# Altium PCB DE-250624.PcbDoc
Units mm, origin at the board's own origin, x right, y up, seen from the top; angles counter-clockwise.
Board outline 75 x 75 mm, 2 copper layers (Top Layer, Bottom Layer); 75 components, 46 nets, 198 pads, 28 vias.
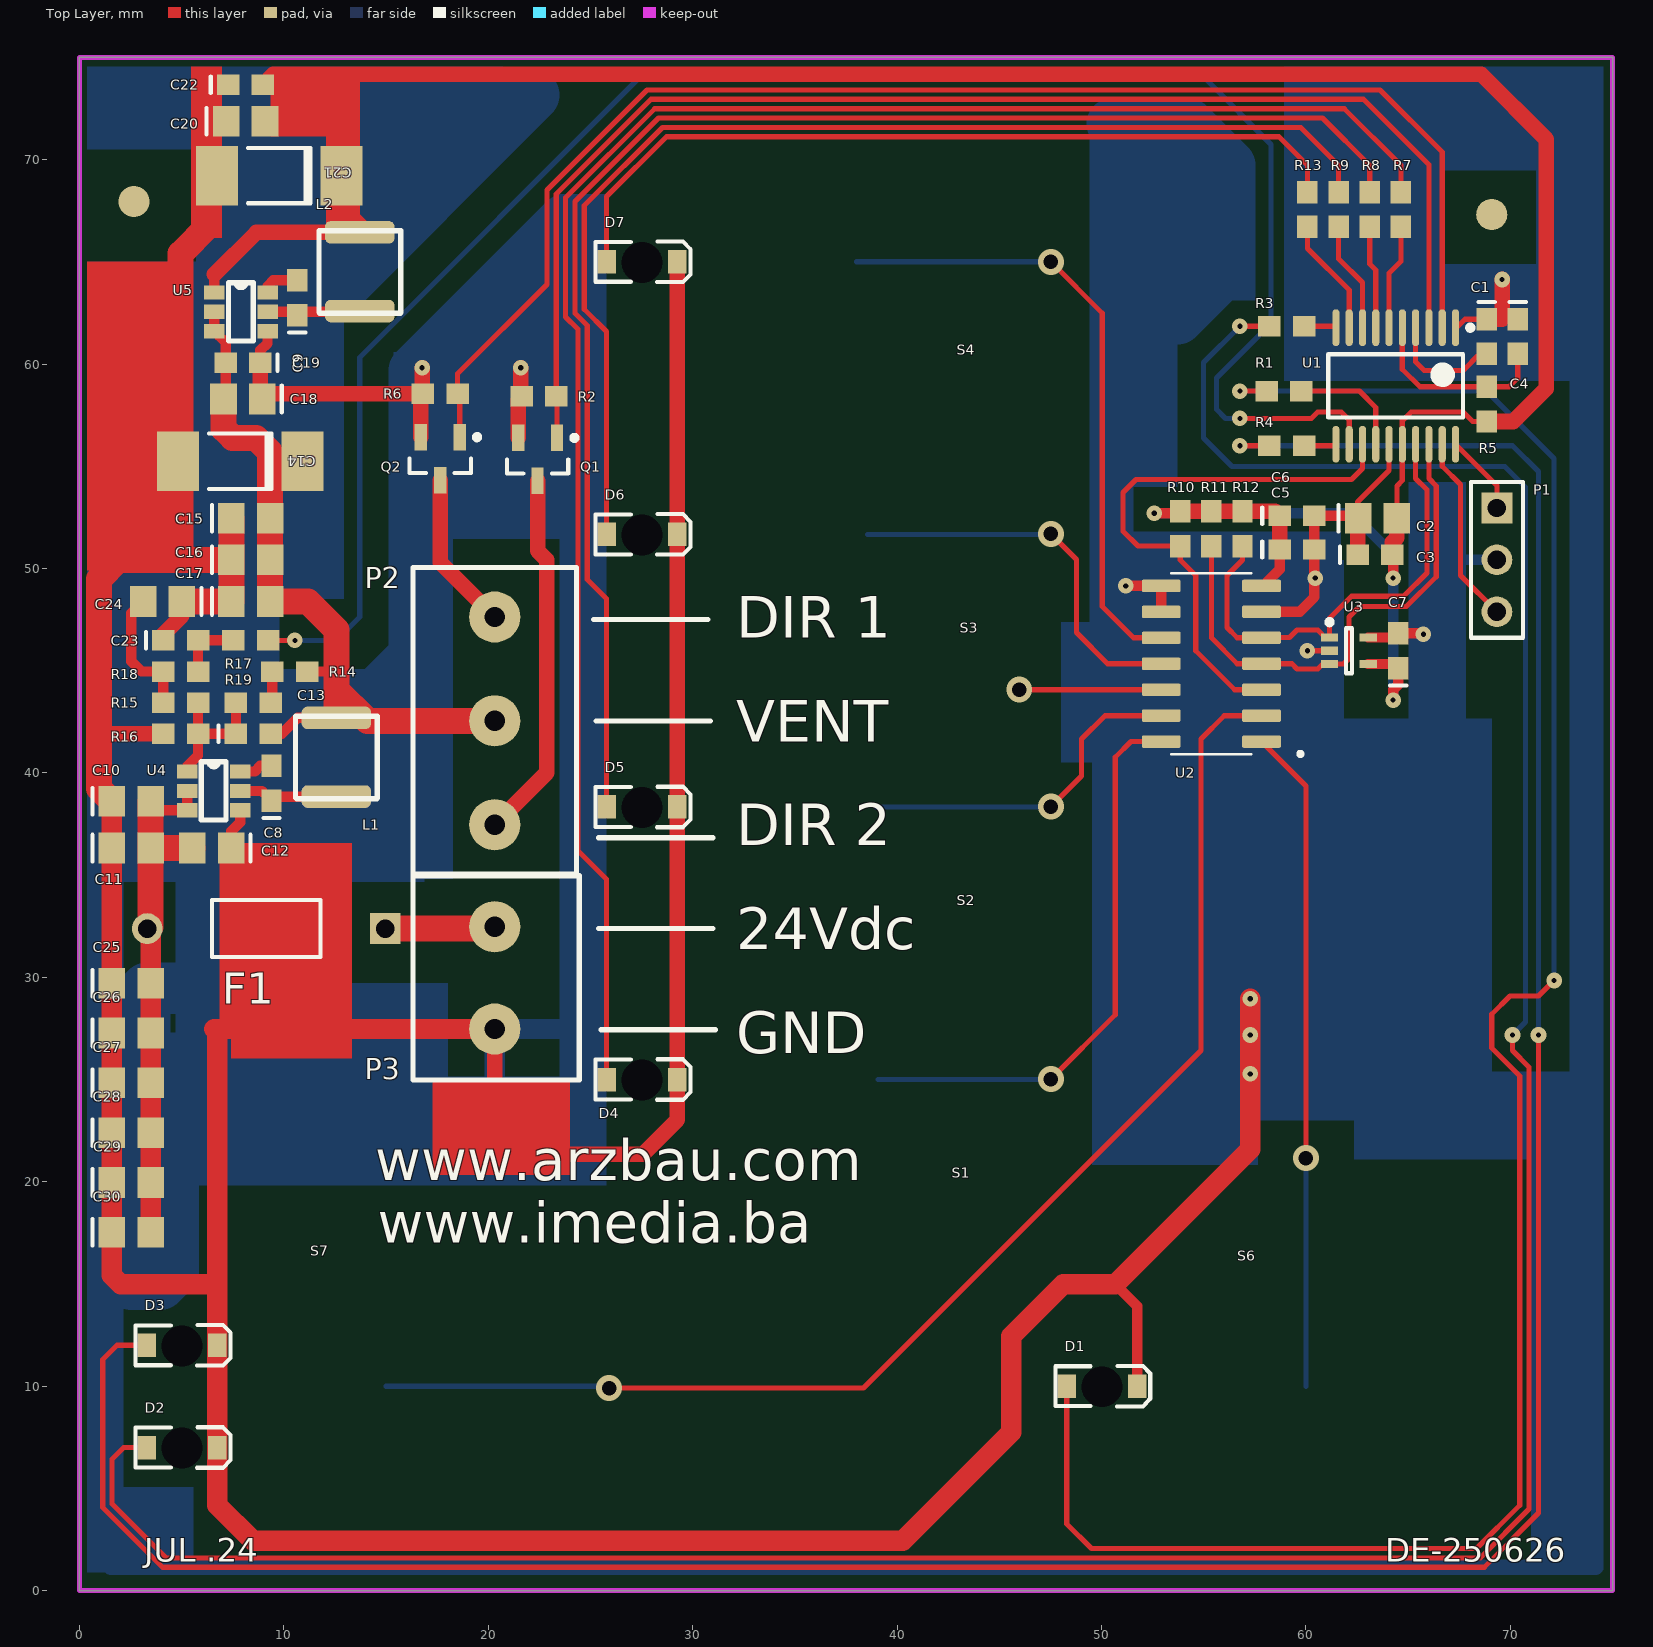
[diagram p0: Top Layer view]
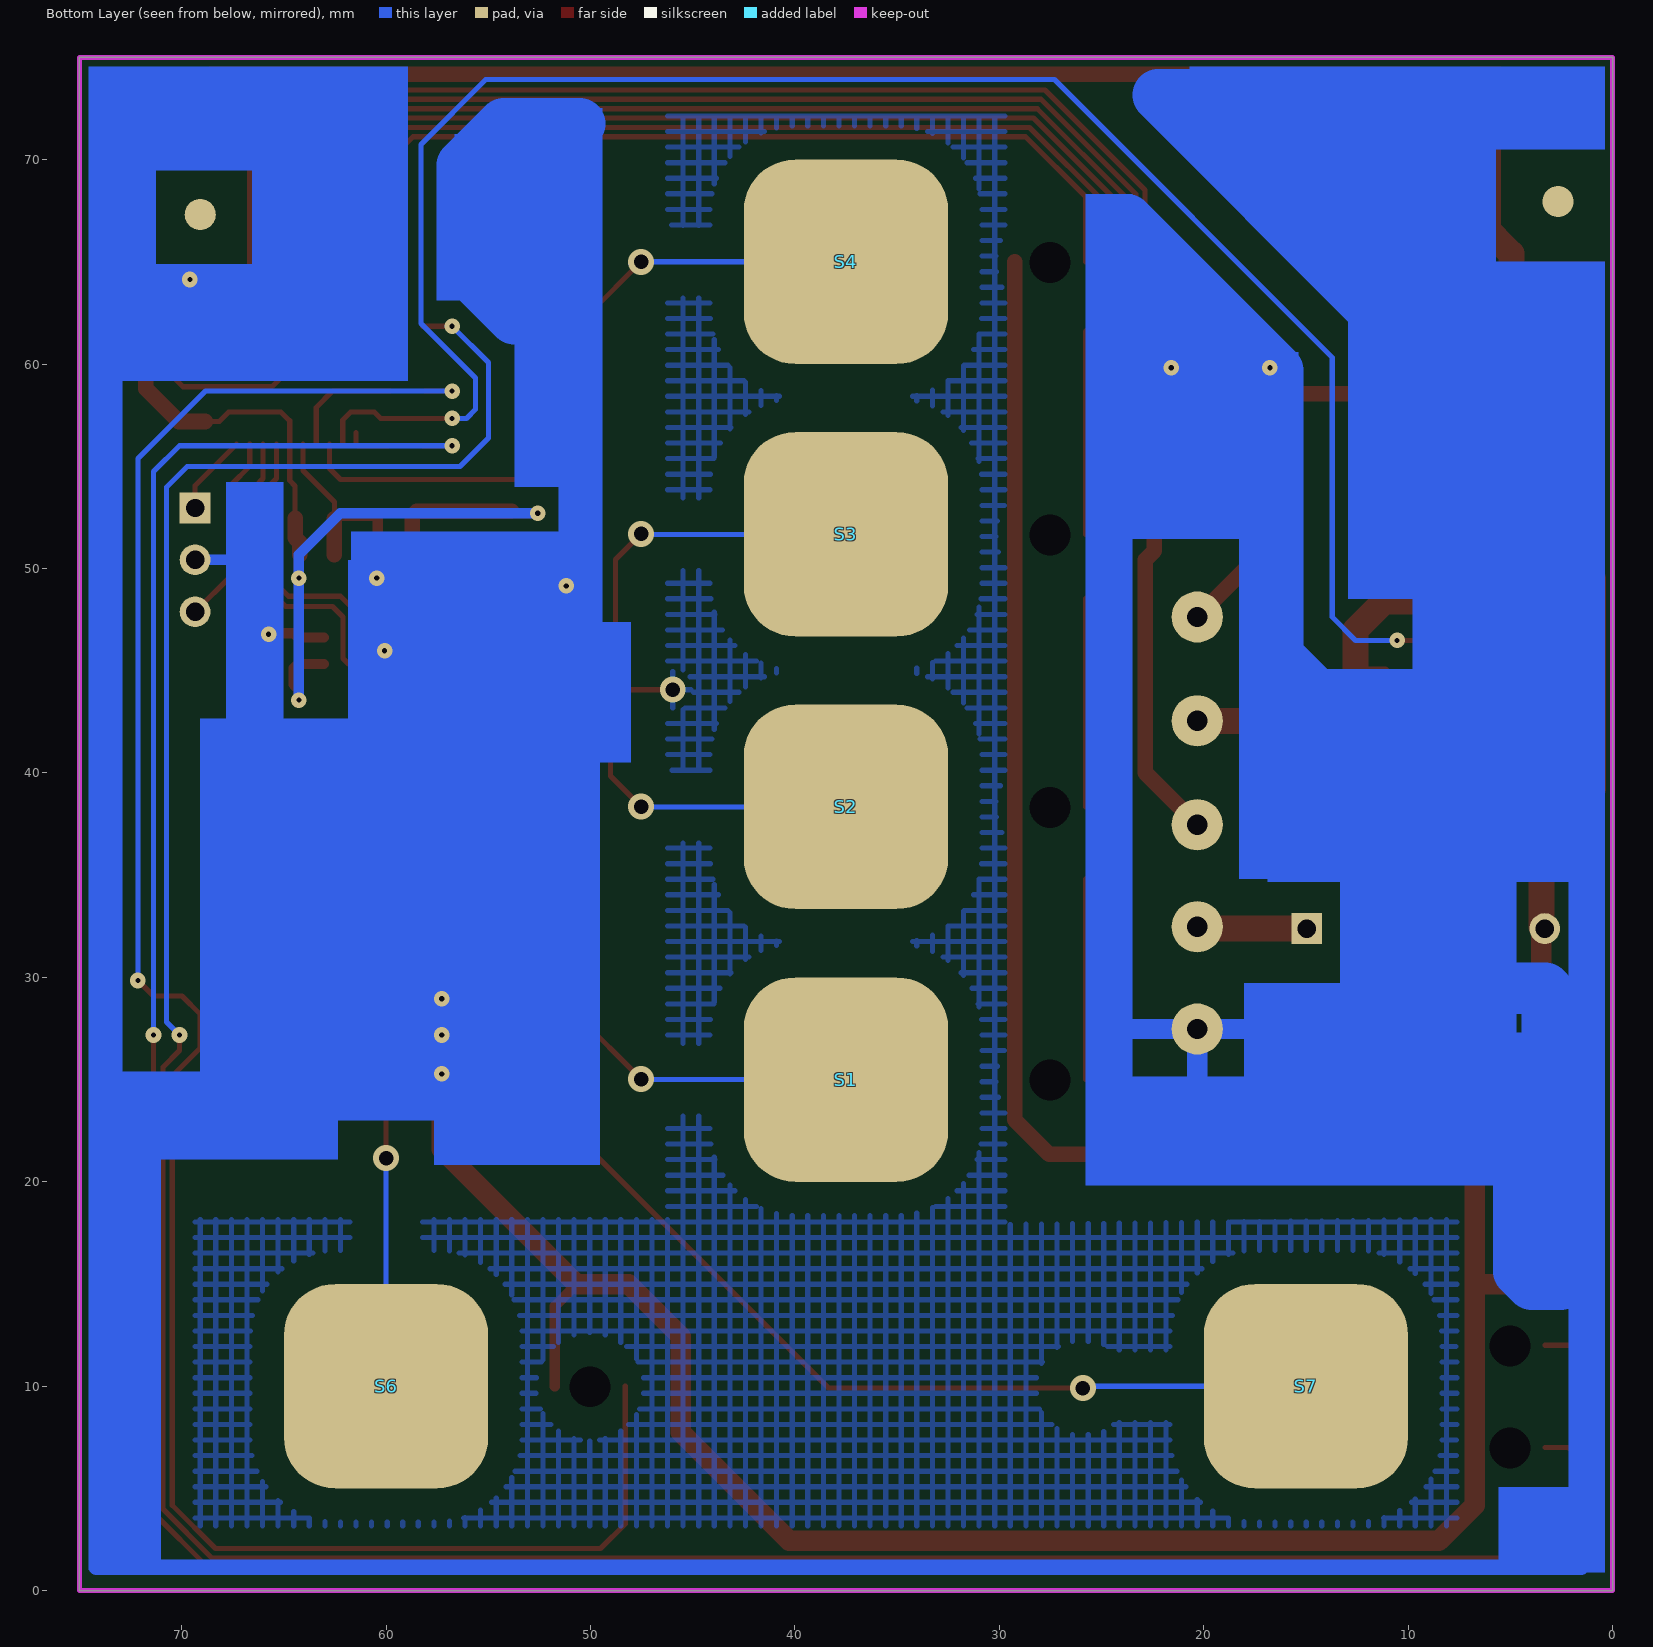
[diagram p1: Bottom Layer view, seen from below]

## Layer stack, top to bottom
Top Solder: solder mask 0.0102, Solder Resist, Dk 3.5
Top Layer: signal copper 0.0356
Dielectric 1: dielectric 0.32, FR-4, Dk 4.8
Bottom Layer: signal copper 0.0356
Bottom Solder: solder mask 0.0102, Solder Resist, Dk 3.5

## Board outline
0,0 0,75 75,75 75,0

## Design rules (kind name [scope] priority, off if disabled: settings)
Clearance [All] p1: gap=0.203 ignorepadtopadclearanceinfootprint=FALSE except(0: Arc-Hole Track-Hole SMDPad-Hole THPad-Hole Via-Hole Fill-Hole Poly-Hole Region-Hole Text-Hole; 1.524: Arc-Poly Track-Poly SMDPad-Poly THPad-Poly Via-Poly Fill-Poly Poly-Poly)
MinimumSolderMaskSliver [All] p1 off: minsoldermaskwidth=0.254
PlaneClearance [All] p1: clearance=0.254
PolygonConnect [All] p1: connectstyle=Relief reliefconductorwidth=0.254 reliefentries=4 polygonreliefangle="90 Angle" airgapwidth=0.254
RoutingVias [All] p1: holewidth=0.711 width=1.27 viastyle="Through Hole" minholewidth=0.254 minwidth=0.762 maxholewidth=1.27 maxwidth=2.54
SilkToSilkClearance [All] p1 off: silktosilkclearance=0.254
SilkToSolderMaskClearance [IsPad] p1 off: minsilkscreentomaskgap=0.254 clearancetoexposedcopper=TRUE
SolderMaskExpansion [All] p1: expansion=0.102
Width [All] p1: maxlimit=2.54 minlimit=0.254 preferedwidth=0.508
26 further rules are at their usual default settings.

## Components (designator, comment, footprint, x,y, rotation, side; value= is the part's Value field where it differs from the comment)
C1 "C0603" 0603 68.834,61.341 r270 top value=100nF
C2 "C0805" 0805 63.5,52.451 r0 top value=10uF
C3 "C0603" 0603 63.373,50.673 r0 top value=100nF
C4 "C0603" 0603 70.358,61.341 r270 top value=100nF
C5 "C0603" 0603 59.563,50.927 r0 top value=1uF
C6 "C0603" 0603 59.563,52.578 r0 top value=100nF
C7 "C0603" 0603 64.516,45.974 r90 top value=100nF
C8 "100nF" 0603 9.398,39.497 r90 top
C9 "100nF" 0603 10.668,63.246 r90 top
C10 "C0805" 0805 2.54,38.608 r0 top value=22uF
C11 "C0805" 0805 2.54,36.322 r0 top value=22uF
C12 "C0805" 0805 6.477,36.322 r180 top value=22uF
C13 "C0603" 0603 8.509,41.91 r0 top value=100pF
C14 "22uF" "E (8.2 x 4.3 mm)" 7.874,55.245 r180 top
C15 "C0805" 0805 8.382,52.451 r0 top value=22uF
C16 "C0805" 0805 8.382,50.419 r0 top value=22uF
C17 "C0805" 0805 8.382,48.387 r0 top value=22uF
C18 "C0805" 0805 8.001,58.293 r180 top value=22uF
C19 "C0603" 0603 8.001,60.071 r180 top value=100nF
C20 "C0805" 0805 8.128,71.882 r0 top value=22uF
C21 "22uF" "E (8.2 x 4.3 mm)" 9.779,69.215 r180 top
C22 "C0603" 0603 8.128,73.66 r0 top value=100nF
C23 "C0603" 0603 4.953,46.482 r0 top value=100nF
C24 "C0805" 0805 4.064,48.387 r180 top value=10uF
C25 "C0805" 0805 2.54,29.718 r0 top value=22uF
C26 "C0805" 0805 2.54,27.28 r0 top value=22uF
C27 "C0805" 0805 2.54,24.841 r0 top value=22uF
C28 "C0805" 0805 2.54,22.403 r0 top value=22uF
C29 "C0805" 0805 2.54,19.964 r0 top value=22uF
C30 "C0805" 0805 2.54,17.526 r0 top value=22uF
D1 "LED_ON_OFF" "LED sa rupom" 50,10 r0 top locked
D2 "LED_HREC" "LED sa rupom" 5,7 r0 top locked
D3 "LED_VENT" "LED sa rupom" 5,12 r0 top locked
D4 "LED_SPEED_4" "LED sa rupom" 27.5,25 r0 top locked
D5 "LED_SPEED_3" "LED sa rupom" 27.5,38.333 r0 top locked
D6 "LED_SPEED_2" "LED sa rupom" 27.5,51.667 r0 top locked
D7 "LED_SPEED_1" "LED sa rupom" 27.5,65 r0 top locked
F1 "0ZRG0120FF1E" PIN-W2/E2.8 9.144,32.385 r180 top
L1 "ASPI-4030S-100M-T" ASPI-4030S 12.573,40.767 r180 top
L2 "ASPI-4030S-100M-T" ASPI-4030S 13.716,64.516 r180 top
P1 "ICSP" HDR1X3 69.342,52.959 r270 top
P2 "VENT" "TERMINAL BLOK 3" 20.32,42.545 r0 top
P3 "DC_IN" "TERMINAL BLOK 2" 20.32,29.972 r0 top
Q1 "ZXMN3B14F" SOT23_N 22.413,55.338 r270 top
Q2 "ZXMN3B14F" SOT23_N 17.653,55.372 r270 top
R1 "2K2" ERA-0603 58.928,58.674 r180 top
R2 "10K" ERA-0603 22.479,58.42 r0 top
R3 "2K2" ERA-0603 59.055,61.849 r180 top
R4 "2K2" ERA-0603 59.055,56.007 r180 top
R5 "10R" ERA-0603 68.834,58.039 r90 top
R6 "10K" ERA-0603 17.653,58.547 r0 top
R7 "2K2" ERA-0603 64.643,67.564 r90 top
R8 "2K2" ERA-0603 63.119,67.564 r90 top
R9 "2K2" ERA-0603 61.595,67.564 r90 top
R10 "10K" ERA-0603 53.848,51.943 r90 top
R11 "10K" ERA-0603 55.372,51.943 r90 top
R12 "10K" ERA-0603 56.896,51.943 r90 top
R13 "2K2" ERA-0603 60.071,67.564 r90 top
R14 "22K" ERA-0603 10.287,44.958 r180 top
R15 "120K" ERA-0603 4.953,43.434 r180 top
R16 "22K" ERA-0603 4.953,41.91 r0 top
R17 "1K2" ERA-0603 8.382,46.482 r180 top
R18 "10K" ERA-0603 4.953,44.958 r180 top
R19 "330K" ERA-0603 8.509,43.434 r0 top
S1 "SENS_SPEED_1" SENSOR_PAD#1 38.862,24.765 r0 top
S2 "SENS_SPEED_2" SENSOR_PAD#2 37.719,38.552 r0 top
S3 "SENS_SPEED_3" SENSOR_PAD#3 38.862,51.667 r0 top
S4 "SENS_SPEED_4" SENSOR_PAD#4 38.608,63.754 r0 top
S6 "SENS_ON_OFF" SENSOR_PAD#5 59.563,14.986 r0 top
S7 "SENS_MODE" SENSOR_PAD#6 14.859,14.732 r0 top
U1 "STM32F030F4P6" STM-TSSOP20_N 64.389,58.928 r270 top
U2 "CAP1298" SOIC14 55.372,45.339 r180 top
U3 "24AA01T-I/LT" SC70-LT5_N 62.103,45.974 r0 top
U4 "AP63200" TSOT-26 5.274,40.066 r0 top
U5 "AP63203" TSOT-26 6.604,63.5 r0 top

## Footprints (in the part's own frame and the unit in brackets; to place one, negate y for a bottom-side part, rotate by r counter-clockwise, add the part's x,y. Pads: shape width x height; smd on the part's side, far side on the other; paste and mask are expansions set on the pad)
0603 [mm] "Chip Capacitor; Body 1.6 x 0.8 mm (LxW typ)"
  rect 1.1x1 smd: 1(-0.85,0) 2(0.85,0)
  silkscreen extent -1.7,-0.4 -1.7,0.4
0805 [mm] "Chip Capacitor; Body 2.0 x 1.2 mm (LxW typ)"
  rect 1.3x1.5 smd: 1(-0.95,0) 2(0.95,0)
  silkscreen extent -1.9,-0.65 -1.9,0.65
ASPI-4030S [mm] "SMD Inductor ASPI-4030S"
  rrect50% 3.4x1.1 smd: 1(0,1.925) 2(0,-1.925)
  silkscreen extent -2.01,-2.01 2,2.03, body extent -2.11,-2.13 2.11,2.16, height 3
"E (8.2 x 4.3 mm)" [mm] "Chip Capacitor; Body 8.2 x 4.3 mm"
  rect 2.05x2.9 smd: 1(-3.05,0) 2(3.05,0)
  silkscreen extent -1.52,-1.35 1.54,1.35
ERA-0603 [mm] "Chip Resistor; Body 1.6 x 0.8 mm (LxW typ)"
  rect 1.1x1 smd: 1(-0.85,0) 2(0.85,0)
HDR1X3 [mm] "Connector; Header; 3 Position"
  rect 1.5x1.5 hole 0.9: 1(0,0)
  round 1.5 hole 0.9: 2(2.54,0) 3(5.08,0)
  silkscreen extent -1.27,-1.27 6.35,1.27
"LED sa rupom" [mm] "SM LED; 2 Flat Leads"
  rect 0.9x1.15 smd: 1(-1.702,0) 2(1.753,0)
  round 0 hole 2: ""(0.025,-0.025)
  silkscreen extent -2.26,-0.99 2.38,0.99
PIN-W2/E2.8 [mm] "Thru-Hole; 2 Leads"
  rect 1.5x1.5 hole 0.9: 1(-5.825,0)
  round 1.5 hole 0.9: 2(5.825,0)
  silkscreen extent -2.65,-1.4 2.65,1.4
SC70-LT5_N [mm] "SOT353, 5-Leads, Body 2x1.3mm, Pitch 0.65mm, Lead Span 2.1mm, IPC Medium Density"
  rect 0.85x0.4 smd: 1(-0.95,0.65) 2(-0.95,0) 3(-0.95,-0.65) 4(0.95,-0.65) 5(0.95,0.65)
  silkscreen extent -1.07,-1.1 0.15,1.52, body extent -0.7,-1.1 0.7,1.1, height 1.1
SENSOR_PAD#1 [mm] "pcb trace touch sensor pad"
  rrect50% 10x10 smd far side: 1(-1.362,0.235)
SENSOR_PAD#2 [mm] "pcb trace touch sensor pad"
  rrect50% 10x10 smd far side: 1(-0.219,-0.219)
SENSOR_PAD#3 [mm] "pcb trace touch sensor pad"
  rrect50% 10x10 smd far side: 1(-1.362,0)
SENSOR_PAD#4 [mm] "pcb trace touch sensor pad"
  rrect50% 10x10 smd far side: 1(-1.108,1.246)
SENSOR_PAD#5 [mm] "pcb trace touch sensor pad"
  rrect50% 10x10 smd far side: 1(0.437,-4.986)
SENSOR_PAD#6 [mm] "pcb trace touch sensor pad"
  rrect50% 10x10 smd far side: 1(0.141,-4.732)
SOIC14 [mm]
  rrect25% 1.9x0.6 smd: 1(-2.455,3.81) 2(-2.455,2.54) 3(-2.455,1.27) 4(-2.455,0) 5(-2.455,-1.27) 6(-2.455,-2.54) 7(-2.455,-3.81) 8(2.455,-3.81) 9(2.455,-2.54) 10(2.455,-1.27) 11(2.455,0) 12(2.455,1.27) 13(2.455,2.54) 14(2.455,3.81)
  silkscreen extent -4.45,-4.43 1.95,4.51, body extent -3,-4.33 3,4.33, height 1.75
SOT23_N [mm] "SOT23, 3-Leads, Body 2.9x1.3mm, Pitch 0.95mm, Lead Span 2.3mm, IPC Medium Density"
  rect 1.3x0.6 smd: 1(-1.05,0.95) 2(-1.05,-0.95) 3(1.05,0)
  silkscreen extent -1.17,-1.5 0.7,1.93, body extent -0.7,-1.5 0.7,1.5, height 1.1
STM-TSSOP20_N [mm] "SOP, 20-Leads, Body 6.6x4.5mm, Pitch 0.65mm, IPC Medium Density"
  oval 1.8x0.35 smd: 1(-2.85,2.925) 2(-2.85,2.275) 3(-2.85,1.625) 4(-2.85,0.975) 5(-2.85,0.325) 6(-2.85,-0.325) 7(-2.85,-0.975) 8(-2.85,-1.625) 9(-2.85,-2.275) 10(-2.85,-2.925) 11(2.85,-2.925) 12(2.85,-2.275) 13(2.85,-1.625) 14(2.85,-0.975) 15(2.85,-0.325) 16(2.85,0.325) 17(2.85,0.975) 18(2.85,1.625) 19(2.85,2.275) 20(2.85,2.925)
  silkscreen extent -2.97,-3.3 1.55,3.78, body extent -2.25,-3.3 2.25,3.3, height 1.2
"TERMINAL BLOK 2" [mm] "Terminal blok 3,5mm"
  round 2.5 hole 1: 1(0,-2.5) 2(0,2.5)
  silkscreen extent -4,-5 4.13,5
"TERMINAL BLOK 3" [mm] "Terminal blok konektor 3 pina"
  round 2.5 hole 1: 1(0,5.08) 2(0,0) 3(0,-5.08)
  silkscreen extent -4,-7.5 4,7.5
TSOT-26 [mm]
  rect 1x0.7 smd: 1(0,0) 2(0,-0.95) 3(0,-1.9) 4(2.6,-1.9) 5(2.6,-0.95) 6(2.6,0)
  silkscreen extent 0.69,-2.38 1.91,0.48, body extent 0.53,-2.51 2.03,0.61, height 1

## Part data
C1 C2 C3 C4 C5 C6 C7 C13 C15 C16 C17 C18 C19 C20 C22 C23 C24: "Ceramic Chip Capacitor - 25V", PackageDocument=Mar-2001, ComponentLink1Description="Manufacturer Link", ComponentLink1URL=http://www.kemet.com/, ComponentLink2Description=Datasheet, ComponentLink2URL=http://www.kemet.com/kemet/web/homepage/kechome.nsf/vapubfilesname/F3102TA.pdf/$file/F3102TA.pdf, DatasheetDocument=Mar-2001, LatestRevisionDate=19-Mar-2004, LatestRevisionNote="Silkscreen size reduced.", Note="Footprint corresponds to dimensions for bulk cassette packaging. This case size has tightened tolerances.", Published=17-Jul-2002, Publisher="Altium Limited"
  C1 C3 C4 C5 C6 C7 C13 C19 C22 C23: Code_IPC="1608 [0603]", Code_JEITA=0603, PackageReference=0603
  C2 C15 C16 C17 C18 C20 C24: Code_IPC=2012[0805], Code_JEITA=0805, PackageReference=0805
C8 C9: library part C0603, "Ceramic Chip Capacitor - 25V", PackageDocument=Mar-2001, Code_IPC="1608 [0603]", Code_JEITA=0603, ComponentLink1Description="Manufacturer Link", ComponentLink1URL=http://www.kemet.com/, ComponentLink2Description=Datasheet, ComponentLink2URL=http://www.kemet.com/kemet/web/homepage/kechome.nsf/vapubfilesname/F3102TA.pdf/$file/F3102TA.pdf, DatasheetDocument=Mar-2001, LatestRevisionDate=19-Mar-2004, LatestRevisionNote="Silkscreen size reduced.", Note="Footprint corresponds to dimensions for bulk cassette packaging. This case size has tightened tolerances.", PackageReference=0603, Published=17-Jul-2002, Publisher="Altium Limited"
C10 C12 C25 C26 C27 C28 C29 C30: "Ceramic Chip Capacitor - 35V", PackageDocument=Mar-2001, Code_IPC=2012[0805], Code_JEITA=0805, ComponentLink1Description="Manufacturer Link", ComponentLink1URL=http://www.kemet.com/, ComponentLink2Description=Datasheet, ComponentLink2URL=http://www.kemet.com/kemet/web/homepage/kechome.nsf/vapubfilesname/F3102TA.pdf/$file/F3102TA.pdf, DatasheetDocument=Mar-2001, LatestRevisionDate=19-Mar-2004, LatestRevisionNote="Silkscreen size reduced.", Note="Footprint corresponds to dimensions for bulk cassette packaging. This case size has tightened tolerances.", PackageReference=0805, Published=17-Jul-2002, Publisher="Altium Limited"
C11: "Ceramic Chip Capacitor -  35V", PackageDocument=Mar-2001, Code_IPC=2012[0805], Code_JEITA=0805, ComponentLink1Description="Manufacturer Link", ComponentLink1URL=http://www.kemet.com/, ComponentLink2Description=Datasheet, ComponentLink2URL=http://www.kemet.com/kemet/web/homepage/kechome.nsf/vapubfilesname/F3102TA.pdf/$file/F3102TA.pdf, DatasheetDocument=Mar-2001, LatestRevisionDate=19-Mar-2004, LatestRevisionNote="Silkscreen size reduced.", Note="Footprint corresponds to dimensions for bulk cassette packaging. This case size has tightened tolerances.", PackageReference=0805, Published=17-Jul-2002, Publisher="Altium Limited"
C14 C21: library part "TMCME1E226 TRF", "Tantalum Chip Capacitor: 22uF  25VDC", ComponentLink1Description="Manufacturer Link", ComponentLink1URL=http://www.vishay.com/, DatasheetDocument=05-Jul-2002, Note="See Data Sheet for full range of components", PackageReference=E, Published=19-Mar-2004, Publisher="Altium Limited"
D1 D4 D5 D6 D7: library part HSMC-C540-F0001, "Avago HSMW-C265", LED_Colour=Red, PackageDocument=30-Apr-2002, ComponentLink1Description="Manufacturer Link", ComponentLink1URL=http://www.agilent.com/, ComponentLink2Description=Datasheet, ComponentLink2URL=http://cp.literature.agilent.com/litweb/pdf/5988-5794EN.pdf, DatasheetDocument=7-Mar-2002, LuminousIntensity="96mcd (Minimum).", PackageReference=2.0X1.25X1.2, PCB_Layout="Complies with manufacturer's recommendation.", Published=11-Dec-2002, Publisher="Altium Limited"
D2: library part HSMC-C540-F0001, "Avago HSML-C265", LED_Colour=Red, PackageDocument=30-Apr-2002, ComponentLink1Description="Manufacturer Link", ComponentLink1URL=http://www.agilent.com/, ComponentLink2Description=Datasheet, ComponentLink2URL=http://cp.literature.agilent.com/litweb/pdf/5988-5794EN.pdf, DatasheetDocument=7-Mar-2002, LuminousIntensity="96mcd (Minimum).", PackageReference=2.0X1.25X1.2, PCB_Layout="Complies with manufacturer's recommendation.", Published=11-Dec-2002, Publisher="Altium Limited"
D3: library part HSMC-C540-F0001, "Avago HSMR-C265", LED_Colour=Red, PackageDocument=30-Apr-2002, ComponentLink1Description="Manufacturer Link", ComponentLink1URL=http://www.agilent.com/, ComponentLink2Description=Datasheet, ComponentLink2URL=http://cp.literature.agilent.com/litweb/pdf/5988-5794EN.pdf, DatasheetDocument=7-Mar-2002, LuminousIntensity="96mcd (Minimum).", PackageReference=2.0X1.25X1.2, PCB_Layout="Complies with manufacturer's recommendation.", Published=11-Dec-2002, Publisher="Altium Limited"
F1: library part "Fuse Thermal", "30 VDC 2 A Resettable Fuse - PPTC", LatestRevisionDate=17-Jul-2002, LatestRevisionNote="Re-released for DXP Platform.", PackageDescription="Thru-Hole; 2 Leads", PackageReference=PIN-W2/E2.8, Published=24-Mar-1999, Publisher="Altium Limited"
L1 L2: library part ASPI-4030S, "Wire Wound Magnetically Shielded SMD Power Inductor", Code_IEC=1005, Code_JEITA=0402, LatestRevisionDate=29-May-2009, LatestRevisionNote="IPC-7351 Footprint Added.", PackageDescription="Chip Inductor", PackageReference=0402-A, Published=8-Jun-2000, Publisher="Altium Limited"
P1: library part "Header 3", "Header, 3-Pin", LatestRevisionDate=17-Jul-2002, LatestRevisionNote="Re-released for DXP Platform.", Publisher="Altium Limited"
P2: library part "TERMINAL BLOK 3", "3 pinski terminal blok konektor"
P3: library part "TERMINAL BLOK 2", "Terminal blok konektor 3,5 mm"
Q1 Q2: library part BSS123, "N-channel Enhancement Mode Vertical D-MOSFET", ComponentLink1Description="Manufacturer Link", ComponentLink1URL=http://www.semiconductors.philips.com/, ComponentLink2Description=Datasheet, ComponentLink2URL=http://www.semiconductors.philips.com/acrobat/datasheets/BSS123_3.pdf, DatasheetVersion=Apr-1995, LatestRevisionDate=12-Dec-2006, LatestRevisionNote="IPC-7351 Footprint Added.", PackageDescription="3-Pin SOT-23 Package 0.95 mm Pitch, 2.3 mm Lead Span", PackageReference=SOT23, PackageVersion=May-1999, Published=17-Sep-2003, Publisher="Altium Limited"
R1 R2 R3 R4 R5 R6 R7 R8 R9 R10 R11 R12 R13 R14 R15 R16 R17 R18 R19: library part ERAV, "Metal Film Thermosensitive Chip Resistor, 0.56 Ohm to 10k Ohm Range, 5% Tolerance, 0603 Size, 0.063 W", PackageDocument=Mar-2003, Code_IPC="1608 [0603]", ComponentLink1Description="Manufacturer Link", ComponentLink1URL=http://www.panasonic.com/industrial/components/resistive_products.htm, ComponentLink2Description=Datasheet, ComponentLink2URL=http://www.panasonic.com/industrial/components/pdf/AOF0000CE1.pdf, LatestRevisionDate=19-Mar-2004, LatestRevisionNote="Silkscreen size reduced.", Note="If flow soldering, adjust pad width of PCB Footprint to 0.7 - 0.8 times the width of the resistor.", PackageReference=ERA-0603, Published=17-Dec-2003, Publisher="Altium Limited"
S1 S2 S3 S4 S6 S7: library part "Touch sensor"
U1: "ARM Cortex-M0 32-bit MCU, 16 KB Flash, 4 KB Internal RAM, 15 I/Os, 20-pin TSSOP, -40 to 85 degC, Tube", I/Os (High Current)=15, Operating Frequency(F) (Processor speed) (MHz)=48, Supplier Part Number 1=497-14044-5-ND, Supply Voltage(Vcc) min (V)=2.4, ComponentLink1Description="Manufacturer URL", ComponentLink1URL=http://www.st.com/web/en/home.html, ComponentLink2Description=Datasheet, ComponentLink2URL=http://www.st.com/st-web-ui/static/active/en/resource/technical/document/datasheet/DM00088500.pdf, ComponentLink3Description="Package Specification", ComponentLink3URL=http://www.st.com/st-web-ui/static/active/en/resource/technical/document/datasheet/DM00065136.pdf, Core="ARM Cortex-M0", DatasheetVersion="Rev. 1", FLASH Size (Prog) (kB)=16, Internal RAM Size (kB)=4, Mounting Technology="Surface Mount", PackageDescription="20-Pin Thin Shrink Small Outline Package, 6.5 x 4.4 mm Body, 0.65 mm Pitch", PackageReference=TSSOP20, PackageVersion="Rev. 1, 11/2012", Packing=Tube, PartNumber=STM32F030F4P6, Supplier 1=Digi-Key, Supplier 2=Newark, Supplier 3=Mouser, Supplier Part Number 2=06X3648, Supplier Part Number 3=511-STM32F030F4P6
U2: "8 chanel capacitive sensor ic", Code_IPC=SOIC127P600-16, ComponentLink1Description="Manufacturer Link", ComponentLink1URL=http://www.ti.com/, ComponentLink2Description=Datasheet, ComponentLink2URL=http://www-s.ti.com/sc/ds/sn74hc595.pdf, DatasheetVersion=May-1997, LatestRevisionDate=13-Apr-2006, LatestRevisionNote="IPC-7351 Footprint Added.", PackageDescription="16-Pin Small Outline Integrated Circuit 1.27 mm Pitch", PackageReference=D016, PackageVersion=Jan-1998, Published=8-Jun-2000, Publisher="Altium Limited"
U3: library part 24LC01BHT-I/LT, "1Kbit, 400kHz, 2.5V, I2C Serial EEPROM, 5-Pin SC70, Industrial Temperature, Tape and Reel", Supplier Part Number 1=24LC01BHT-I/LTTR-ND, Code_IPC=SOT353-5, ComponentLink1Description=Datasheet, ComponentLink1URL=http://ww1.microchip.com/downloads/en/DeviceDoc/22104A.pdf, ComponentLink2Description="Packaging Specification", ComponentLink2URL=http://www.microchip.com/stellent/groups/techpub_sg/documents/packagingspec/en012702.pdf, ComponentLink3Description="Microchip.com Home", ComponentLink3URL=http://www.microchip.com/, DatasheetVersion="revA, Sep-2008", PackageDescription="5-Lead Plastic Small Outline Transistor (LT) [SC70]", PackageReference=SC70-LT5, PackageVersion="revBB, Aug-2009", Published=2-Dec-2009, Publisher="Altium Limited", Supplier 1=Digi-Key, Supplier 2=Digi-Key, Supplier 3=Digi-Key, Supplier Part Number 2=24LC01BHT-I/LTCT-ND, Supplier Part Number 3=24LC01BHT-I/LTDKR-ND
U4: "2A synchronous  buck converter"
U5: library part AP63200, "2A synchronous  buck converter"

## Free pads (board coordinates)
  round 1.524 all layers, no hole: 2(2.667,67.945) 2(69.088,67.31)

## Via types
v1: diameter 0.762, hole 0.254, Top Layer to Bottom Layer, 21 vias
v2: diameter 1.27, hole 0.711, Top Layer to Bottom Layer, 7 vias

## Nets (pads, with @x,y where several pads share a name; then routed paths per layer and width w, separated by ;. In a path a pad name is that pad's centre, name@x,y a point inside that pad or via, vN(x,y) a via of type N, cw(c..) or ccw(c..) an arc to the next point about the centre after c; other vN are vias at no path point)
+3V3: C2.2 C3.2 C5.1 C6.1 C7.1 C20.2 C21.1 C22.2 L2.2 R5.1 R10.2 R11.2 R12.2 U1.16 U2.7 U3.4 U5.1 | length 141.3
  Top Layer w0.254: C2.2 64.45,54.036 64.714,54.3 U1.16 64.714,57.221 65.151,57.658 67.691,57.658 68.16,57.189 R5.1
  Top Layer w0.508: U5.1 6.604,64.389 ; v1(52.578,52.705) 53.76,52.705 R10.2 ; U2.7 57.912,49.149 58.713,49.95 C5.1 ; U3.4 64.316,45.324 C7.1 64.516,44.323 64.262,44.069 v1(64.262,43.561) ; C3.2 64.262,50.634 v1(64.262,49.53)
  Top Layer w0.762: 6.604,64.389 8.656,66.441 L2.2@12.573,66.441 ; C22.2 9.486,74.168 12.827,74.168 ; L2.2 13.716,66.802 12.829,67.689 C21.1 12.829,74.166 12.827,74.168 ; R10.2 R11.2 R12.2 58.498,52.793 C6.1 C5.1 ; C3.2 64.223,51.269 64.45,51.496 C2.2 ; R5.1 70.143,57.189 71.755,58.801 71.755,70.993 68.58,74.168 12.827,74.168
  Bottom Layer w0.508: v1(52.578,52.705) 62.23,52.705 64.262,50.673 v1(64.262,49.53) v1(64.262,43.561)
+PWR: C10.2 C11.2 C12.2 C25.2 C26.2 C27.2 C28.2 C29.2 C30.2 F1.2 U4.2 U4.3 | length 26
  Top Layer w0.508: C10.2 3.932,38.166 U4.3 U4.2
  Top Layer w1.016: C30.2 C29.2 C28.2 C27.2 C26.2 C25.2 F1.2@3.49,32.468
  Top Layer w1.27: F1.2@3.49,32.468 C11.2 ; C10.2 C11.2 ; C12.2 C11.2
+VREG: C13.2 C14.1 C15.2 C16.2 C17.2 C18.2 C19.2 L1.2 P2.2 R14.1 U5.2 U5.3 | length 37.3
  Top Layer w0.508: U5.2 U5.3 7.151,61.053 C19.2 7.151,58.393 C18.2 ; C13.2 9.906,41.91 10.688,42.692 L1.2 ; R14.1 12.446,44.958 12.573,45.085
  Top Layer w1.27: C18.2 7.051,56.83 7.493,56.388 8.636,56.388 9.332,55.692 C15.2 C16.2 C17.2 11.176,48.387 12.573,46.99 12.573,45.085 12.573,44.069 ; L1.2@12.573,42.926 12.573,44.069 ; P2.2 14.097,42.545 12.573,44.069
ALERT: R10.1 U1.13 U2.3 | length 27.8
  Top Layer w0.254: U2.3 56.515,44.069 54.61,45.974 54.61,49.657 53.848,50.419 R10.1 51.777,51.093 51.054,51.816 51.054,53.721 51.689,54.356 62.23,54.356 62.764,54.89 U1.13
I2C1_SCL: R12.1 U1.17 U2.5 U3.1 | length 23
  Top Layer w0.254: R12.1 56.896,50.419 56.134,49.657 56.134,47.117 56.642,46.609 U2.5 57.842,46.624 59.197,46.624 59.563,46.99 60.579,46.99 60.945,46.624 U3.1 61.153,47.564 62.23,48.641 64.77,48.641 65.913,49.784 65.913,53.848 65.364,54.397 U1.17
I2C1_SDA: R11.1 U1.18 U2.4 U3.3 | length 25.8
  Top Layer w0.254: R11.1 55.372,46.609 56.642,45.339 U2.4 59.309,45.339 59.563,45.085 60.579,45.085 60.833,45.339 61.138,45.339 U3.3 61.834,45.324 62.103,45.593 62.103,47.625 62.611,48.133 64.909,48.133 66.37,49.595 66.37,54.037 66.014,54.394 U1.18
LED_HREC: R3.1 U1.10 | length 1.6
  Top Layer w0.254: R3.1 61.393,61.849 U1.10
LED_ON_OFF: R1.1 U1.14 | length 5.8
  Top Layer w0.254: R1.1 62.611,58.674 63.414,57.871 U1.14
LED_SPEED_1: R13.1 U1.9 | length 5.8
  Top Layer w0.254: R13.1 60.071,65.659 62.114,63.616 U1.9
LED_SPEED_2: R9.1 U1.8 | length 5.4
  Top Layer w0.254: R9.1 61.595,65.151 62.764,63.982 U1.8
LED_SPEED_3: R8.1 U1.7 | length 5.1
  Top Layer w0.254: R8.1 63.119,64.897 63.414,64.602 U1.7
LED_SPEED_4: R7.1 U1.6 | length 5.2
  Top Layer w0.254: U1.6 64.064,64.445 64.643,65.024 R7.1
LED_VENT: R4.1 U1.11 | length 2.2
  Top Layer w0.254: R4.1 61.393,56.007 U1.11 U1.11@61.464,56.646
NetC1_2: C1.2 U1.4 | length 5.6
  Top Layer w0.254: U1.4 65.364,60.112 65.786,59.69 67.691,59.69 68.492,60.491 C1.2
NetC4_2: C4.2 R5.2 U1.5 | length 9.4
  Top Layer w0.254: U1.5 64.714,59.746 65.571,58.889 R5.2 69.938,58.889 70.358,59.309 C4.2
NetC8_1: C8.1 L1.1 U4.5 | length 5
  Top Layer w0.508: U4.5 8.929,39.116 C8.1 9.593,38.842 L1.1
NetC8_2: C8.2 U4.6 | length 1.6
  Top Layer w0.508: U4.6 8.57,40.066 8.851,40.347 C8.2
NetC9_1: C9.1 L2.1 U5.5 | length 3.4
  Top Layer w0.508: U5.5 12.532,62.55 L2.1@12.573,62.591
NetC9_2: C9.2 U5.6 | length 1.9
  Top Layer w0.508: U5.6 9.204,63.814 9.486,64.096 C9.2
NetC13_1: C13.1 R15.1 R16.2 R19.1 U4.1 | length 7
  Top Layer w0.508: U4.1 5.274,40.326 5.803,40.855 R16.2 ; R15.1 R16.2 ; R19.1 C13.1 R16.2
NetC23_2: C23.2 R17.2 R18.1 | length 3.3
  Top Layer w0.508: R18.1 C23.2 R17.2
NetC24_2: C24.2 R15.2 R18.2 | length 6.5
  Top Layer w0.508: C24.2 2.54,47.813 2.54,45.466 3.048,44.958 R18.2 R15.2
NetD1_1: D1.1 R1.2 | length 102.2
  Top Layer w0.254: D1.1 48.298,3.264 49.505,2.057 68.34,2.057 70.46,4.177 70.46,25.171 69.088,26.543 69.088,28.194 69.977,29.083 71.374,29.083 v1(72.136,29.845) ; v1(56.769,58.674) R1.2
  Bottom Layer w0.254: v1(56.769,58.674) 68.834,58.674 72.136,55.372 v1(72.136,29.845)
NetD2_1: D2.1 R3.2 | length 150.5
  Top Layer w0.254: D2.1 2.174,7 1.6,6.426 1.6,4.253 4.253,1.6 68.529,1.6 70.917,3.988 70.917,25.603 70.104,26.416 v1(70.104,27.178) ; v1@57.023,61.849 R3.2
  Bottom Layer w0.254: v1@57.023,61.849 v1(56.769,61.849) 54.991,60.071 54.991,56.388 56.388,54.991 69.723,54.991 70.739,53.975 70.739,27.813 v1(70.104,27.178)
NetD3_1: D3.1 R4.2 | length 149.7
  Top Layer w0.254: D3.1 1.84,12 1.143,11.303 1.143,4.064 4.064,1.143 68.719,1.143 71.374,3.798 v1(71.374,27.178) ; v1(56.769,56.007) R4.2
  Bottom Layer w0.254: v1(56.769,56.007) 70.104,56.007 71.374,54.737 v1(71.374,27.178)
NetD4_1: D4.1 R7.2 | length 89.1
  Top Layer w0.254: D4.1@25.781,25 25.781,34.798 24.384,36.195 24.384,61.699 23.786,62.297 23.786,68.132 28.145,72.492 61.874,72.492 64.643,69.723 R7.2
NetD5_1: D5.1 R8.2 | length 73.1
  Top Layer w0.254: D5.1@25.781,38.333 25.781,48.514 24.841,49.454 24.841,61.888 24.243,62.486 24.243,67.943 28.335,72.034 60.808,72.034 63.119,69.723 R8.2
NetD6_1: D6.1 R9.2 | length 57.1
  Top Layer w0.254: D6.1@25.781,51.667 25.781,61.595 24.701,62.675 24.701,67.754 28.524,71.577 59.741,71.577 61.595,69.723 R9.2
NetD7_1: D7.1 R13.2 | length 40.6
  Top Layer w0.254: D7.1@25.781,65 25.781,68.187 28.714,71.12 58.674,71.12 60.071,69.723 R13.2
NetF1_1: F1.1 P3.2 | length 5.4
  Top Layer w1.27: F1.1@15.223,32.385 P3.2@20.574,32.385
NetR14_2: R14.2 R19.2 | length 1.6
  Top Layer w0.508: R19.2 9.437,43.512 R14.2
NetS1_1: S1.1 U2.14 | length 28.6
  Top Layer w0.254: v2(47.522,25.019) 50.673,28.17 50.673,40.767 51.435,41.529 U2.14
  Bottom Layer w0.254: S1.1@39.067,25 v2@48.011,25 ; v2@48.03,25 v2@48.011,25 ; v2@48.03,25.019 v2@48.011,25
NetS2_1: S2.1 U2.13 | length 17.4
  Top Layer w0.254: v2(47.522,38.354) 49.022,39.854 49.022,41.656 50.165,42.799 U2.13
  Bottom Layer w0.254: S2.1@38.942,38.333 v2@48.009,38.333 ; v2@48.03,38.333 v2@48.009,38.333 ; v2@48.03,38.354 v2@48.009,38.333
NetS3_1: S3.1 U2.11 | length 19.6
  Top Layer w0.254: v2(47.522,51.689) 48.768,50.443 48.768,46.863 50.292,45.339 U2.11
  Bottom Layer w0.254: S3.1@38.562,51.667 v2@48.008,51.667 ; v2@48.03,51.667 v2@48.008,51.667 ; v2@48.03,51.689 v2@48.008,51.667
NetS4_1: S4.1 U2.10 | length 31.6
  Top Layer w0.254: v2(47.522,65) 50.038,62.484 50.038,48.133 51.562,46.609 U2.10
  Bottom Layer w0.254: S4.1@38.008,65 v2(47.522,65) v2@47.927,65 ; v2@48.03,64.897 v2@47.927,65 ; v2@48.03,65 v2@47.927,65
NetS5_1: U2.12 | length 6.9
  Top Layer w0.254: v2(45.974,44.069) U2.12
NetS6_1: S6.1 U2.1 | length 32.4
  Top Layer w0.254: U2.1 60,39.356 v2(60,21.153)
  Bottom Layer w0.254: S6.1 v2(60,21.153)
NetS7_1: S7.1 U2.2 | length 65.4
  Top Layer w0.254: v2(25.908,9.906) 38.354,9.906 54.864,26.416 54.864,41.656 56.007,42.799 U2.2
  Bottom Layer w0.254: S7.1 25.814,10 v2(25.908,9.906)
SWCLK: P1.1 U1.20 | length 4
  Top Layer w0.254: U1.20 69.342,54.05 P1.1
SWDIO: P1.3 U1.19 | length 9.3
  Top Layer w0.254: U1.19 66.664,55.002 67.564,54.102 67.564,49.657 P1.3
VENT_1: P2.3 Q1.3 | length 18.1
  Top Layer w0.762: P2.3 22.86,40.005 22.86,50.419 22.413,50.866 Q1.3
VENT_2: P2.1 Q2.3 | length 7.8
  Top Layer w0.762: Q2.3 17.653,50.292 P2.1
VENT_DIR_IN: Q1.1 R2.2 U1.3 | length 65.8
  Top Layer w0.254: Q1.1 23.363,58.386 R2.2 23.329,68.322 27.956,72.949 62.814,72.949 66.014,69.749 U1.3
VENT_DIR_OUT: Q2.1 R6.2 U1.2 | length 69.6
  Top Layer w0.254: Q2.1 18.603,58.447 R6.2 18.503,59.524 22.872,63.893 22.872,68.511 27.767,73.406 63.627,73.406 66.664,70.369 U1.2
VREG_PWM: R17.1 U1.12 | length 91.4
  Top Layer w0.254: R17.1 v1(10.541,46.482) ; v1(56.769,57.34) 60.261,57.34 60.579,57.658 61.722,57.658 62.114,57.266 U1.12
  Bottom Layer w0.254: v1(10.541,46.482) 12.573,46.482 13.716,47.625 13.716,60.325 27.305,73.914 55.118,73.914 58.293,70.739 58.293,61.976 55.626,59.309 55.626,57.785 56.07,57.34 v1(56.769,57.34)
VSS: C1.1 C2.1 C3.1 C4.1 C5.2 C6.2 C7.2 C10.1 C11.1 C12.1 C14.2 C15.1 C16.1 C17.1 C18.1 C19.1 C20.1 C21.2 C22.1 C23.1 C24.1 C25.1 C26.1 C27.1 C28.1 C29.1 C30.1 D1.2 D2.2 D3.2 D4.2 D5.2 D6.2 D7.2 P1.2 P3.1 Q1.2 Q2.2 R2.1 R6.1 R16.1 U1.1 U1.15 U2.6 U2.8 U2.9 U3.2 U3.5 U4.4 U5.4 | length 497.1
  Top Layer w0.254: v1(60.071,45.974) U3.2 ; C2.1@62.523,52.424 62.523,53.252 64.064,54.793 U1.15 ; U1.1 67.366,61.778 67.779,62.191 C1.1
  Top Layer w0.508: C12.1 7.427,37.145 7.874,37.592 U4.4 ; C19.1 8.851,60.667 9.204,61.02 U5.4 ; 50.673,14.986 51.753,13.906 D1.2 ; v1(51.181,49.149) U2.8 U2.9 ; U2.6 59.69,47.879 60.413,48.602 C5.2 C6.2 C2.1@62.369,52.578 ; U3.5 64.316,46.624 C7.2 65.698,46.824 v1(65.742,46.78)
  Top Layer w0.762: 0.965,41.91 R16.1 ; C23.1 4.103,46.775 5.014,47.686 C24.1 ; 6.604,27.472 6.753,27.323 ; C21.2@7.051,68.834 C21.2@7.278,69.061 ; C19.1 8.851,58.393 C18.1 9.205,58.547 R6.1@16.764,58.547 ; Q2.2 16.703,58.447 16.764,58.508 R6.1@16.764,58.547 ; v1(16.764,59.817) R6.1@16.764,58.547 ; P3.1 20.32,22.606 21.59,21.336 27.559,21.336 29.253,23.03 D4.2 D5.2 D6.2 D7.2 ; Q1.2 21.463,58.254 R2.1 21.59,58.459 v1(21.59,59.817) ; C3.1 C2.1@62.523,52.424 ; C1.1 69.596,62.191 v1(69.596,64.135)
  Top Layer w1: C10.1 C11.1 C25.1 C26.1 C27.1 C28.1 C29.1 C30.1 1.59,15.428 2.032,14.986 6.753,14.986 ; 6.604,27.472 7.366,27.472 ; 6.753,27.323 6.753,14.986 ; C12.1 7.366,36.261 7.366,27.472 ; P3.1 7.366,27.472 ; v1(57.277,28.956) v1(57.277,27.178) v1(57.277,25.273) 57.277,21.59 50.673,14.986 48.133,14.986 45.593,12.446 45.593,7.747 40.276,2.43 8.492,2.43 6.753,4.169 D2.2 D3.2 6.753,14.986
  Top Layer w1.27: C10.1 0.965,39.233 0.965,41.91 0.965,49.479 1.905,50.419 C16.1 ; 4.953,61.341 4.953,65.405 6.35,66.802 6.35,73.533 ; C24.1 C17.1 C16.1 ; C15.1 C16.1
  Bottom Layer w0.508: 66.167,50.419 P1.2
  Bottom Layer w0.762: 1.524,1.143 74.168,1.143 ; v1(16.764,59.817) v1(21.59,59.817)
  Bottom Layer w1: 17.613,27.472 P3.1 ; 20.447,23.876 20.32,24.003 P3.1 ; 24.384,27.432 24.344,27.472 P3.1
  Bottom Layer w2.54: 2.921,21.717 2.54,21.336 2.54,14.986 3.937,14.986 4.572,15.621 4.572,26.035 3.683,25.146 3.175,25.146 3.175,29.337 3.302,29.464 7.366,29.464 ; 11.938,43.307 13.97,43.307 16.383,45.72 16.383,59.69 23.749,67.056 23.749,64.516 20.574,61.341 22.987,61.341 24.003,62.357 ; 14.351,67.691 11.938,65.278 11.938,62.865 22.225,73.152 17.907,73.152 ; 50.546,71.755 54.229,71.755 56.261,69.723 56.261,64.77 53.721,62.23
  other v1: 60.452,49.53
pads on no net: D1. D2. D3. D4. D5. D6. D7.

## Polygon pours and split planes (outlines as drawn)
NetS5_1 on Bottom Layer "NETS5_1_L02_P002" (hatched 90Degree grid 0.762 track 0.254, remove dead copper, pour order 2): 7.62,2.667 7.62,18.161 29.718,17.907 29.718,19.812 29.718,72.898 46.101,72.898 46.228,72.771 46.228,18.161 69.342,18.161 69.342,2.667

## Keep-outs
Keep-Out Layer:
  the board outline again, w0.254

## Other copper
Top Layer:
  rectangle net +3V3: 12.065,66.621 13.716,74.166
  rectangle net +3V3: 9.359,71.12 12.954,74.041
  rectangle net VSS: 0.381,49.911 5.588,65.024
  rectangle net VSS: 5.461,66.167 6.985,74.549
  rectangle net VSS: 7.427,26.035 13.335,36.576
  rectangle net VSS: 17.272,20.32 24.003,24.892
Bottom Layer:
  rectangle net VSS: 49.53,20.828 57.658,25.4
  rectangle net VSS: 1.397,0.889 5.588,5.08
  rectangle net VSS: 11.811,24.257 18.034,29.718
  rectangle net VSS: 0.889,44.196 9.779,49.022
  rectangle net VSS: 2.032,48.514 12.954,65.024
  rectangle net VSS: 0.381,0.889 2.159,65.024
  rectangle net VSS: 4.699,24.257 13.335,35.052
  rectangle net VSS: 0.381,34.671 13.081,45.085
  rectangle net VSS: 0.508,19.812 24.003,25.146
  rectangle net VSS: 23.495,19.812 25.781,68.326
  rectangle net VSS: 12.065,34.671 16.891,45.085
  rectangle net VSS: 15.494,34.798 18.288,52.451
  rectangle net VSS: 6.985,67.564 18.034,69.723
  rectangle net VSS: 0.381,70.485 20.701,74.549
  rectangle net VSS: 54.991,68.707 56.642,71.247
  rectangle net VSS: 53.721,63.119 57.531,69.469
  rectangle net VSS: 50.419,53.975 53.721,62.611
  rectangle net VSS: 51.308,62.357 55.118,72.517
  rectangle net VSS: 49.403,49.657 51.562,72.517
  rectangle net VSS: 49.53,22.987 69.088,36.83
  rectangle net VSS: 15.367,51.435 24.511,60.579
  rectangle net VSS: 71.001,1.016 74.549,25.301
  rectangle net VSS: 58.928,59.182 74.549,64.897
  rectangle net VSS: 49.406,46.736 50.673,50.635
  rectangle net VSS: 50.165,42.164 61.722,51.816
  rectangle net VSS: 57.023,39.116 68.453,42.672
  rectangle net VSS: 65.024,39.37 67.818,54.229
  rectangle net VSS: 17.634,57.531 24.257,61.731
  rectangle net VSS: 15.367,57.658 19.05,60.579
  rectangle net VSS: 72.898,1.143 74.549,73.406
  rectangle net VSS: 71.628,60.325 73.66,62.738
  rectangle net VSS: 62.357,21.082 73.914,25.4
  rectangle net VSS: 49.53,35.687 61.849,50.419
  rectangle net VSS: 48.006,40.513 51.181,47.371
  rectangle net VSS: 61.468,33.655 69.088,42.672
  rectangle net VSS: 58.928,72.517 74.549,74.549
  rectangle net VSS: 58.928,64.516 66.548,73.914
  rectangle net VSS: 64.897,69.469 73.66,73.406
  rectangle net VSS: 71.247,63.373 73.787,70.485
  rectangle net VSS: 5.715,64.77 14.986,72.136
  rectangle net VSS: 13.843,68.961 18.669,72.644

## Silkscreen, mask and mechanical layers (free items; w line width, h text height)
Top Overlay:
  lines w0.254: 25.146,47.498 30.734,47.498 ; 25.273,42.545 30.861,42.545 ; 25.4,32.385 30.988,32.385 ; 25.4,36.83 30.988,36.83 ; 25.527,27.432 31.115,27.432
  text "DIR 1" at 32.131,46.609 h2.03
  text "VENT" at 32.131,41.529 h2.03
  text "DIR 2" at 32.131,36.449 h2.03
  text "24Vdc" at 32.131,31.369 h2.03
  text "GND" at 32.131,26.289 h2.03
  text "www.arzbau.com" at 14.478,20.066 h2
  text "www.imedia.ba" at 14.605,17.018 h2
  text "JUL .24" at 3.175,1.016 h2
  text "DE-250626" at 63.881,1.016 h2
Mechanical 15:
  the board outline again, w0.254

## Dimensions
75,75 to 75,0 on Mechanical 1
75,0 to 60,10 on Mechanical 1
82.423,10 to 37.5,25 on Mechanical 1
0,75 to 75,75 on Mechanical 1
75,0 to 60,10 on Mechanical 1
60,0.381 to 50.025,9.975 on Mechanical 1
50.025,-4.445 to 37.5,25 on Mechanical 1
37.5,-5.969 to 27.525,24.975 on Mechanical 1
27.525,-6.096 to 15,10 on Mechanical 1
15,-6.223 to 5.025,6.975 on Mechanical 1
5.025,-6.223 to 0,0 on Mechanical 1
0,0 to 5.025,6.975 on Mechanical 1
-1.651,6.975 to 5.025,11.975 on Mechanical 1
-2.794,11.975 to 27.525,24.975 on Mechanical 1
-4.445,24.975 to 27.525,38.308 on Mechanical 1
27.525,38.308 to 27.525,51.642 on Mechanical 1
27.525,51.642 to 27.525,64.975 on Mechanical 1
27.525,64.975 to 0,75 on Mechanical 1
82.804,25 to 37.5,38.333 on Mechanical 1
82.804,38.333 to 37.5,51.667 on Mechanical 1
82.677,51.667 to 37.5,65 on Mechanical 1
83.058,65 to 82.423,75 on Mechanical 1
0,75 to 27.525,64.975 on Mechanical 1
0,75 to 37.5,65 on Mechanical 1
0,0 to 14.986,-3.175 on Mechanical 1
0,-12.7 to 60,10 on Mechanical 1
0,-3.302 to 50.025,9.975 on Mechanical 1